# Altium PCB MPU6050.PcbDoc
Units mm, origin at the board's own origin, x right, y up, seen from the top; angles counter-clockwise.
Board outline 31.95 x 23.94 mm, 2 copper layers (Top Layer, Bottom Layer); 6 components, 4 nets, 16 pads, 48 vias.
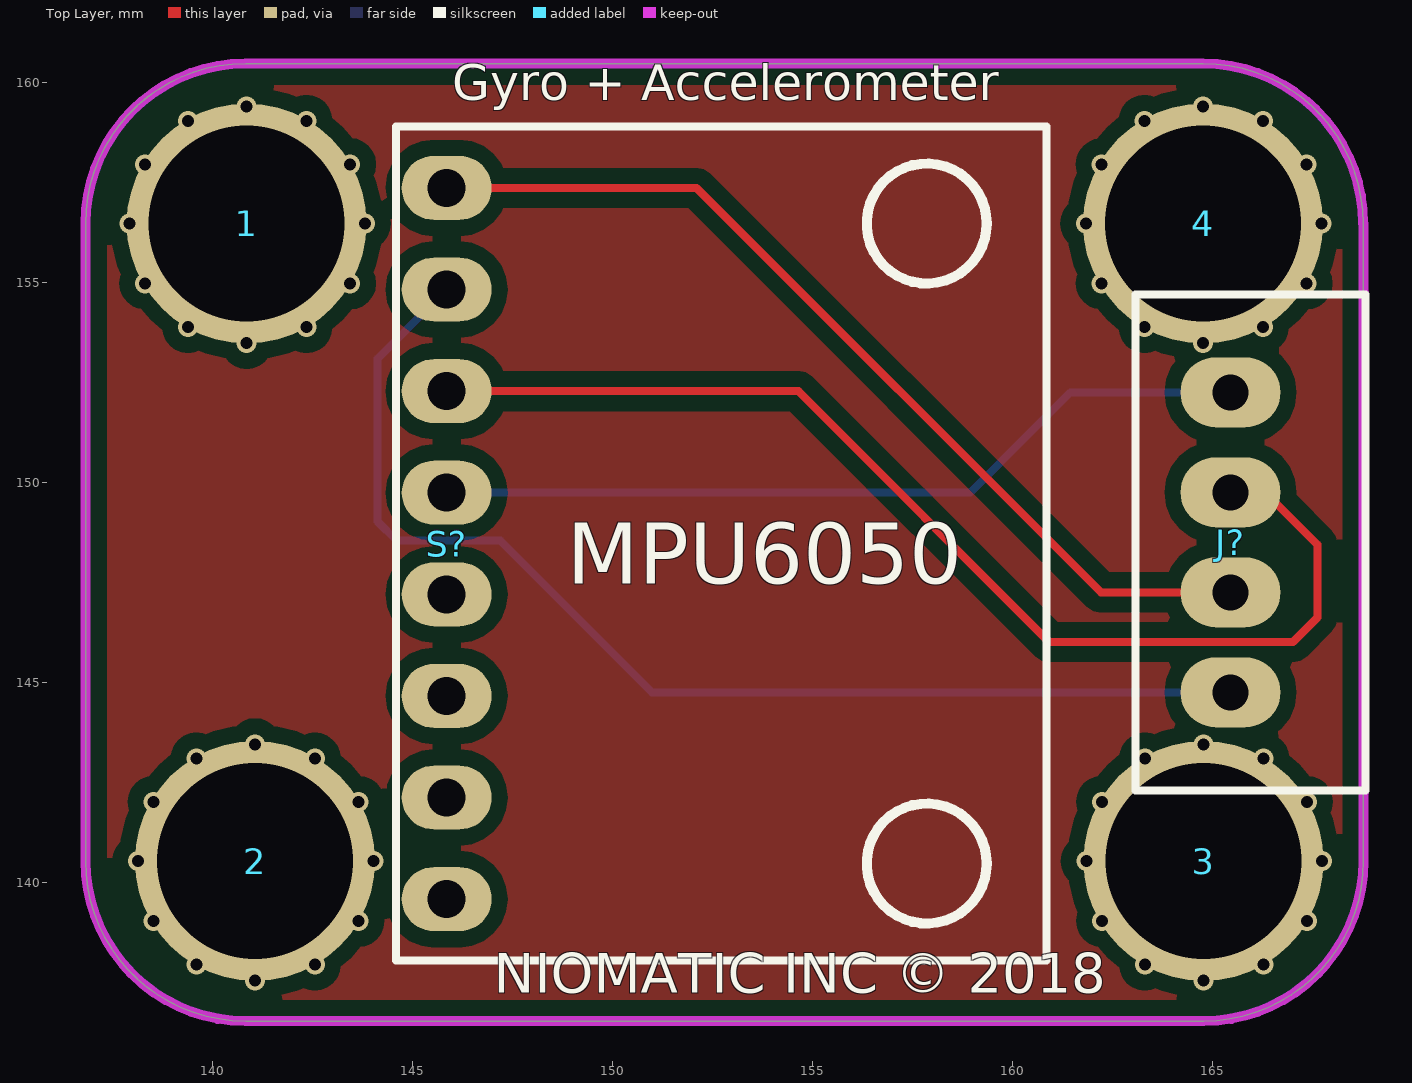
[diagram p0: Top Layer view]
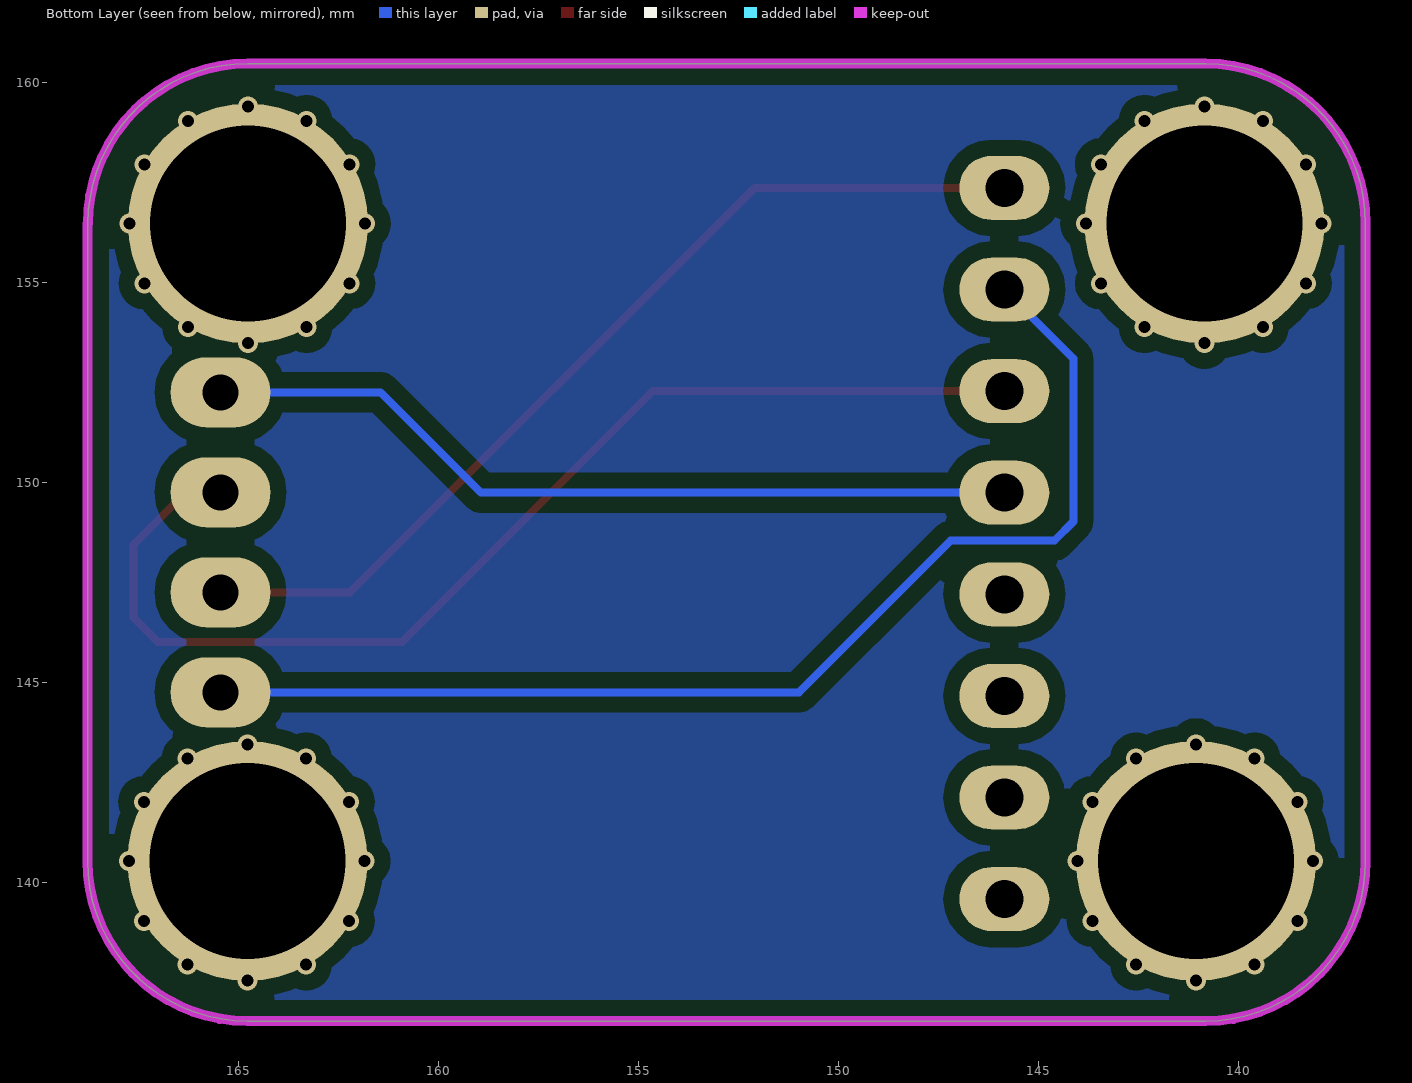
[diagram p1: Bottom Layer view, seen from below]

## Layer stack, top to bottom
Top Solder: solder mask 0.0102, Solder Resist, Dk 3.5
Top Layer: signal copper 0.0356
Dielectric 1: dielectric 0.32, FR-4, Dk 4.8
Bottom Layer: signal copper 0.0356
Bottom Solder: solder mask 0.0102, Solder Resist, Dk 3.5

## Board outline
136.821,140.53 ccw(c140.821,140.53) 140.821,136.53 164.77,136.53 ccw(c164.77,140.53) 168.77,140.53 168.77,156.47 168.761,156.47 ccw(c164.761,156.47) 164.761,160.47 140.821,160.47 ccw(c140.821,156.47) 136.821,156.47 136.821,156.45

## Design rules (kind name [scope] priority, off if disabled: settings)
Clearance [All] p1: gap=0.4 ignorepadtopadclearanceinfootprint=FALSE
PolygonConnect [All] p1: connectstyle=Relief reliefconductorwidth=0.254 reliefentries=4 polygonreliefangle="90 Angle" airgapwidth=0.254
RoomDefinition MPU6050 [InComponentClass('MPU6050')] p1: confinementstyle=ConfineIn formatcopy=TRUE lockcomponents=FALSE outline 178.943,26.924 198.247,26.924 198.247,44.577 178.943,44.577
RoutingVias [All] p1: holewidth=0.2 width=0.5 viastyle="Through Hole" minholewidth=0.2 minwidth=0.5 maxholewidth=0.2 maxwidth=0.5
SolderMaskExpansion [All] p1: expansion=0.102
Width [All] p1: maxlimit=0.2 minlimit=0.2 preferedwidth=0.2
30 further rules are at their usual default settings.

## Components (designator, comment, footprint, x,y, rotation, side; value= is the part's Value field where it differs from the comment)
1 "Lego" "Lego Hole" 140.85,156.47 r90 top
2 "Lego" "Lego Hole" 141.06,140.53 r90 top
3 "Lego" "Lego Hole" 164.771,140.53 r90 top
4 "Lego" "Lego Hole" 164.761,156.47 r90 top
J? "4 Pin" "JST XH B4B-XH-A - RIGHT" 165.445,148.5 r90 top
S? "MPU6050" MPU6050 145.85,148.47 r0 top

## Footprints (in the part's own frame and the unit in brackets; to place one, negate y for a bottom-side part, rotate by r counter-clockwise, add the part's x,y. Pads: shape width x height; smd on the part's side, far side on the other; paste and mask are expansions set on the pad)
"JST XH B4B-XH-A - RIGHT" [mm]
  oval 1.75x2.5 hole 0.9: 1(-3.75,0) 2(-1.25,0) 3(1.25,0) 4(3.75,0)
  silkscreen extent -6.2,-3.38 6.2,2.38, body extent -6.2,-9.13 6.2,2.37, height 6.1
"Lego Hole" [mm]
  round 6 hole 4.9: 0(0,0)
MPU6050 [mm]
  oval 2.25x1.6 hole 0.95: 1(0,8.89) 2(0,6.35) 3(0,3.81) 4(0,1.27) 5(0,-1.27) 6(0,-3.81) 7(0,-6.35) 8(0,-8.89)
  silkscreen extent -1.27,-10.42 15,10.42

## Via types
v1: diameter 0.5, hole 0.3, Top Layer to Bottom Layer, 48 vias

## Nets (pads, with @x,y where several pads share a name; then routed paths per layer and width w, separated by ;. In a path a pad name is that pad's centre, name@x,y a point inside that pad or via, vN(x,y) a via of type N, cw(c..) or ccw(c..) an arc to the next point about the centre after c; other vN are vias at no path point)
GND: J?.1 S?.2 | length 29.6
  Bottom Layer w0.2: S?.2 144.12,153.09 144.12,149.021 144.601,148.54 147.192,148.54 150.982,144.75 J?.1
SCL: J?.3 S?.3 | length 29.2
  Top Layer w0.2: S?.3 154.64,152.28 160.91,146.01 167.01,146.01 167.62,146.62 167.62,148.44 166.31,149.75 J?.3
SDA: J?.4 S?.4 | length 20.6
  Bottom Layer w0.2: S?.4 158.935,149.74 161.445,152.25 J?.4
VCC: J?.2 S?.1 | length 23.8
  Top Layer w0.2: S?.1 152.094,157.36 162.204,147.25 J?.2
pads on no net: 1.0 2.0 3.0 4.0 S?.5 S?.6 S?.7 S?.8
copper on no net:
  other v1: 141.06,137.541 164.771,137.541 139.594,137.941 142.555,137.941 163.305,137.941 166.266,137.941 138.522,139.036 143.649,139.036 162.233,139.036 167.36,139.036 138.13,140.53 144.02,140.53 161.841,140.53 167.731,140.53 138.522,142.011 143.649,142.011 162.233,142.011 167.36,142.011 139.594,143.094 142.555,143.094 163.305,143.094 166.266,143.094 141.06,143.451 164.771,143.451 140.85,153.481 164.761,153.481 139.384,153.881 142.345,153.881 163.295,153.881 166.256,153.881 138.312,154.976 143.439,154.976 162.223,154.976 167.35,154.976 137.92,156.47 143.81,156.47 161.831,156.47 167.721,156.47 138.312,157.951 143.439,157.951 162.223,157.951 167.35,157.951 139.384,159.034 142.345,159.034 163.295,159.034 166.256,159.034 140.85,159.391 164.761,159.391

## Polygon pours and split planes (outlines as drawn)
no net on Top Layer "Top Layer-No Net" (solid, pour order 0): 136.821,140.53 ccw(c140.821,140.53) 140.821,136.53 164.77,136.53 ccw(c164.77,140.53) 168.77,140.53 168.77,156.47 168.761,156.47 ccw(c164.761,156.47) 164.761,160.47 140.821,160.47 ccw(c140.821,156.47) 136.821,156.47 136.821,156.45
no net on Bottom Layer "Top Layer-No Net1" (solid, pour order 1): 136.821,140.53 ccw(c140.821,140.53) 140.821,136.53 164.77,136.53 ccw(c164.77,140.53) 168.77,140.53 168.77,156.47 168.761,156.47 ccw(c164.761,156.47) 164.761,160.47 140.821,160.47 ccw(c140.821,156.47) 136.821,156.47 136.821,156.45

## Keep-outs
Keep-Out Layer:
  lines w0.254: 136.821,140.51 136.821,156.45 ; 136.821,140.53 ccw(c140.821,140.53) 140.821,136.53 164.77,136.53 ccw(c164.77,140.53) 168.77,140.53 168.77,156.47 ; 136.821,156.47 cw(c140.821,156.47) 140.821,160.47 164.761,160.47 cw(c164.761,156.47) 168.761,156.47

## Silkscreen, mask and mechanical layers (free items; w line width, h text height)
Top Overlay:
  text "Gyro + Accelerometer" at 145.991,159.25 h1.52
  text "NIOMATIC INC © 2018" at 147.03,136.91 h1.7
Top Solder:
  drawing of 381 lines, arcs and shapes, not listed
  text "NIOT Kit" at 138.07,145.27 h1.52